# EAGLE board Breadboard Power Supply - 3.3-1.8SMD-Panel-v14 (EAGLE 6.5.0)
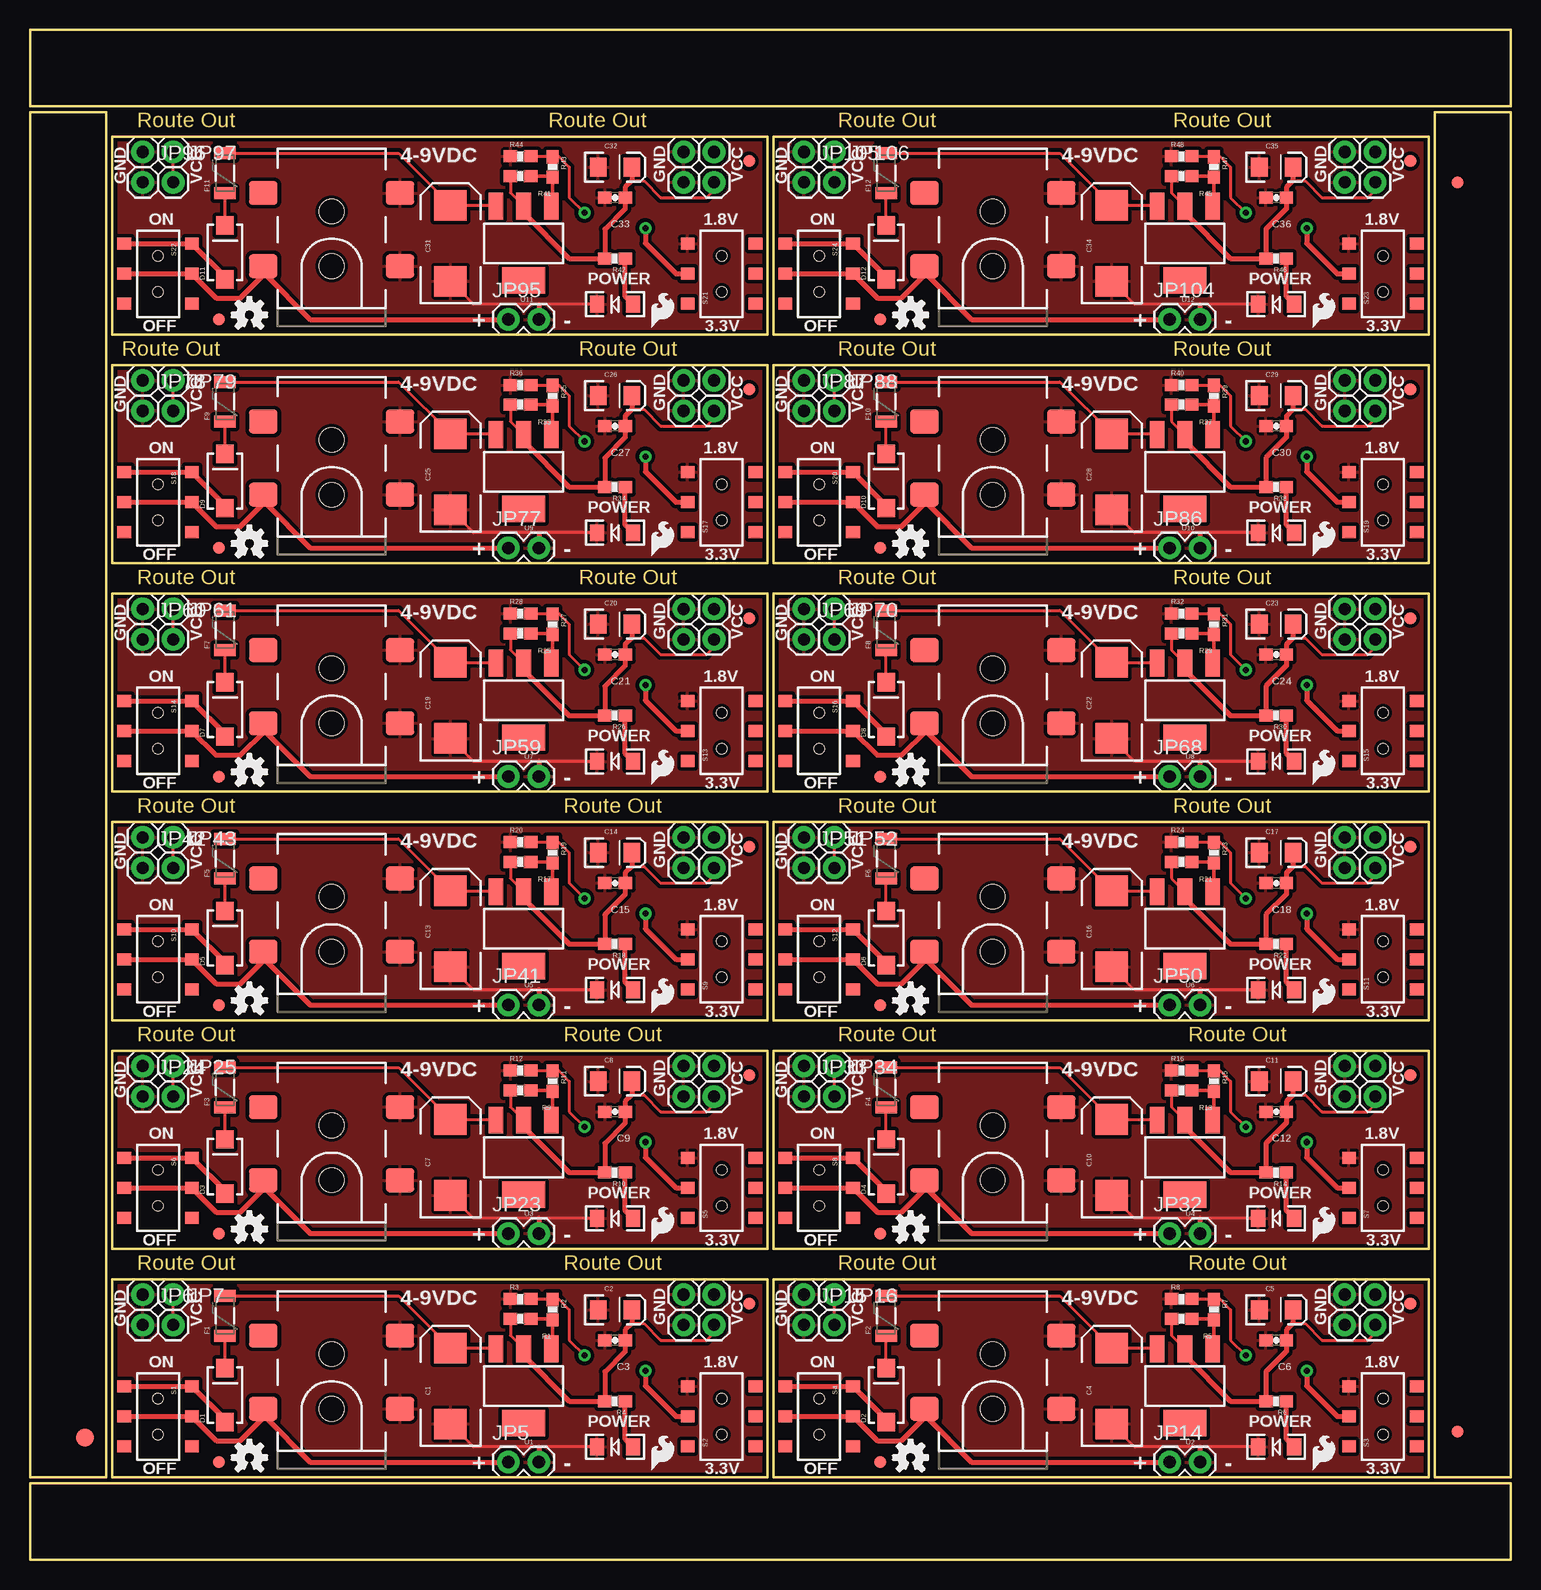
[diagram p0: board, top side]
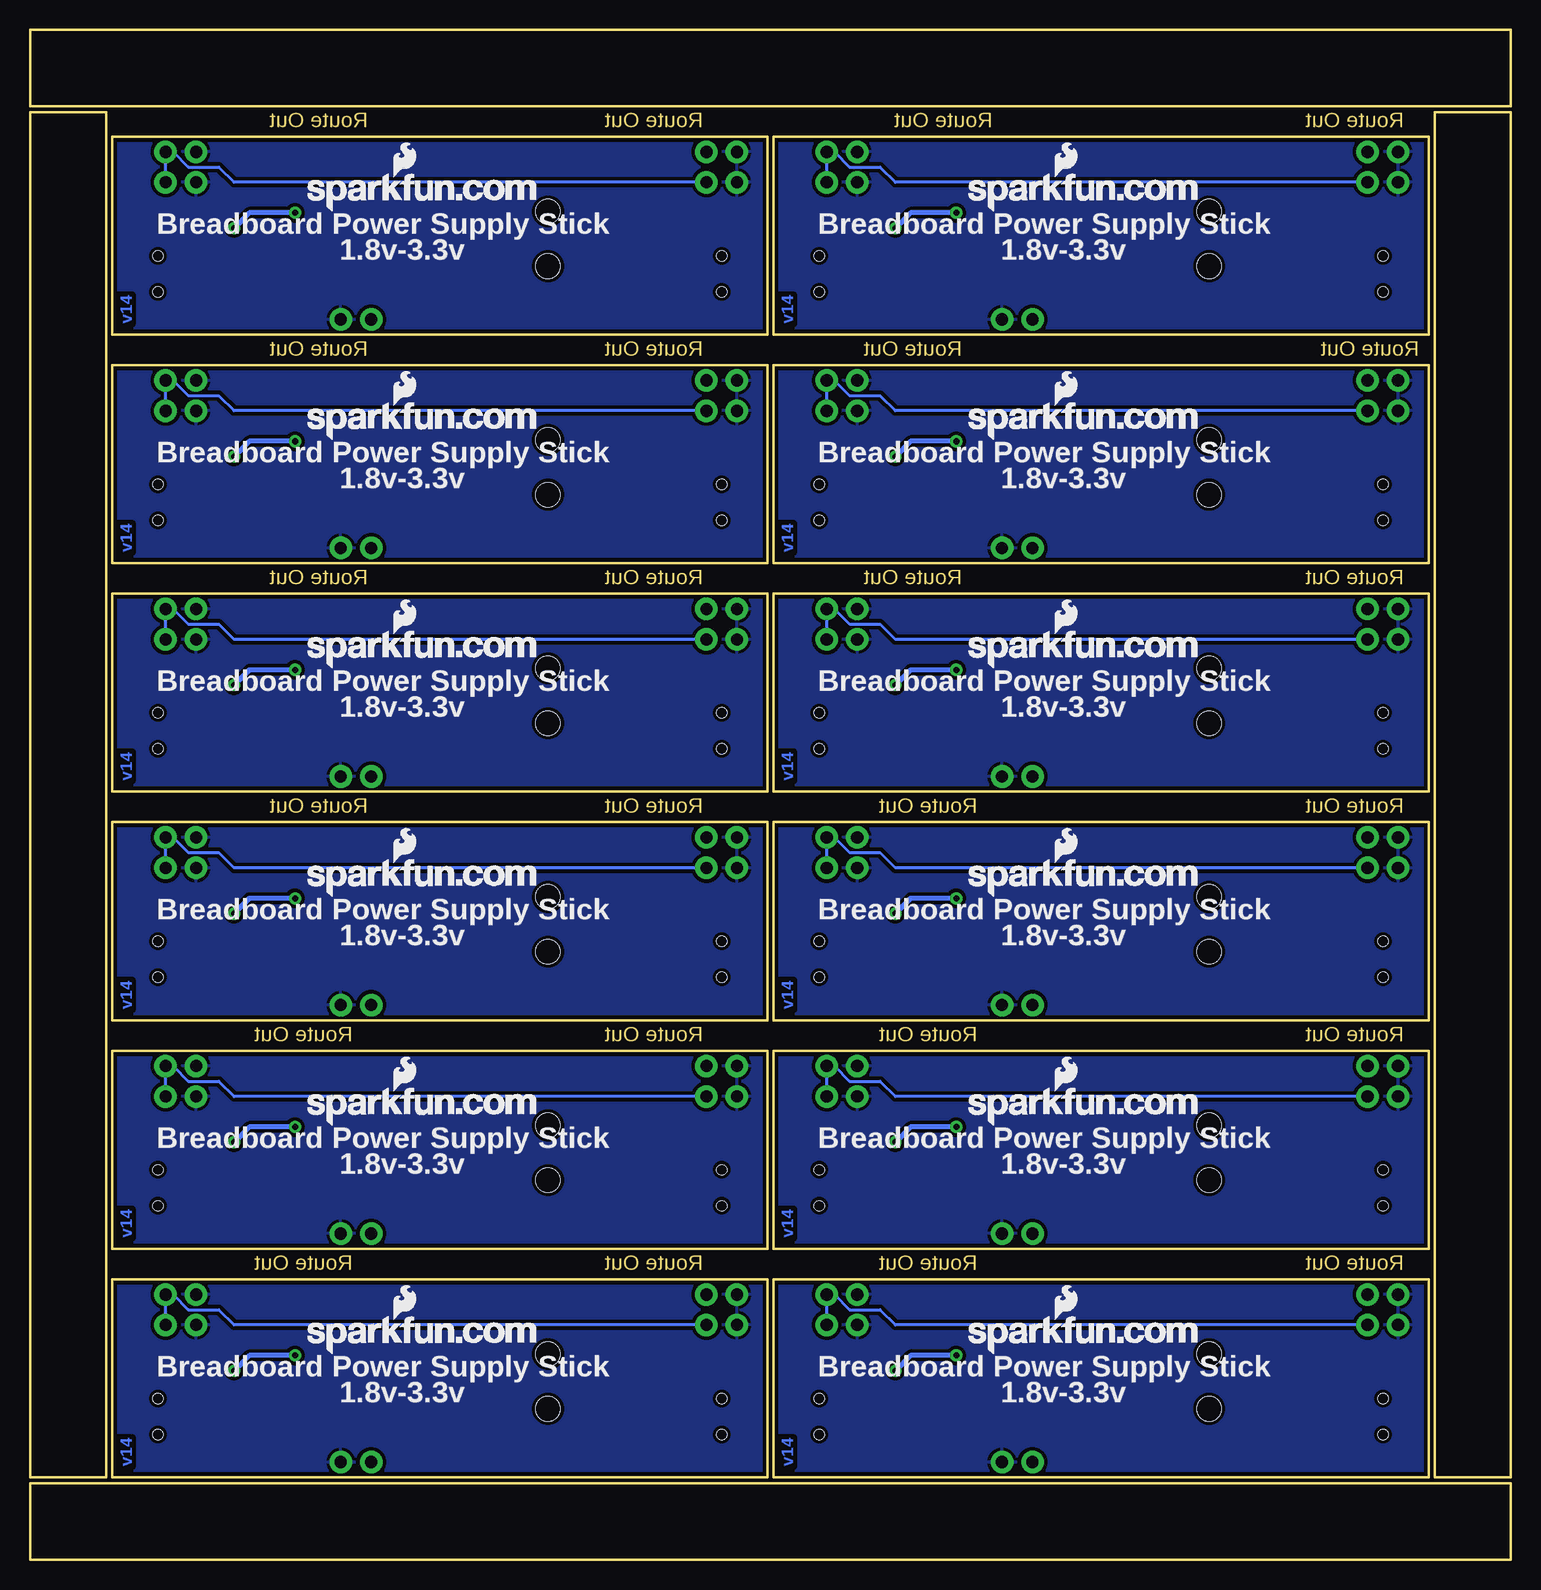
[diagram p1: board, bottom side, seen from below]

Size 123.44 x 127.51 mm. Coordinates in mm from the lower left corner, seen from the top.
Outline: 6.86,6.86 61.47,6.86 61.47,23.37 6.86,23.37 6.86,6.86
Outline: 61.98,6.86 116.59,6.86 116.59,23.37 61.98,23.37 61.98,6.86
Outline: 6.86,25.91 61.47,25.91 61.47,42.42 6.86,42.42 6.86,25.91
Outline: 61.98,25.91 116.59,25.91 116.59,42.42 61.98,42.42 61.98,25.91
Outline: 6.86,44.96 61.47,44.96 61.47,61.47 6.86,61.47 6.86,44.96
Outline: 61.98,44.96 116.59,44.96 116.59,61.47 61.98,61.47 61.98,44.96
Outline: 6.86,64.01 61.47,64.01 61.47,80.52 6.86,80.52 6.86,64.01
Outline: 61.98,64.01 116.59,64.01 116.59,80.52 61.98,80.52 61.98,64.01
Outline: 6.86,83.06 61.47,83.06 61.47,99.57 6.86,99.57 6.86,83.06
Outline: 61.98,83.06 116.59,83.06 116.59,99.57 61.98,99.57 61.98,83.06
Outline: 6.86,102.11 61.47,102.11 61.47,118.62 6.86,118.62 6.86,102.11
Outline: 61.98,102.11 116.59,102.11 116.59,118.62 61.98,118.62 61.98,102.11
Outline: 6.35,6.86 6.35,120.65 0,120.65 0,6.86 6.35,6.86
Outline: 0,0 123.44,0 123.44,6.35 0,6.35 0,0
Outline: 123.44,6.86 123.44,120.65 117.09,120.65 117.09,6.86 123.44,6.86
Outline: 123.44,127.51 0,127.51 0,121.16 123.44,121.16 123.44,127.51
Copper layers (1*16): Top 0.035mm / dielectric 1.5mm / Bottom 0.035mm
Design rules "SparkFun-2-layer": minimum track width 7mil, minimum drill 15mil, track to track 8mil, track to pad 8mil, pad to pad 8mil, via to via 8mil, smd to smd 8mil, copper to edge 8mil, drill to drill 8mil, minimum pad ring 12mil, minimum via ring 10mil, stop-mask expansion 4mil, vias tented up to drill 20mil, thermal gap 10mil
Net classes: 0 default: width 0.203 mm; 1 power: width 0.508 mm

## Footprints (pad centres in the part's own frame; a part is rotated, then mirrored left to right if it is on the bottom)
EIA7343 = smd 2.55 x 2.7: A 3.17,0; C -3.17,0
EIA3216 = smd 1.4 x 1.6: A 1.4,0; C -1.4,0
0603-CAP = smd 1.1 x 1: 1 -0.85,0; 2 0.85,0
SMA-DIODE-TYLERALT1 = smd 1.524 x 1.47: A -2.261,0; C 2.261,0
FIDUCIAL-1.5X3 = smd 1.5 x 1.5: 1 0,0
FIDUCIAL-1X2 = smd 1 x 1: 1 0,0
PTC-1206-WIDE = smd 1 x 1.8: 1 -1.654,0; 2 1.654,0
POWER_JACK_SMD_OVERPASTE_REDBOARD_0603 = smd 2 x 2.4: GND 0,-5.7; P$4 6.1,-5.7; VIN0 0,5.7; VIN1 6.1,5.7 | hole 2.032: 0,0; 4.572,0
1X01 = drill 1.016 pad 1.88: 1 0,0
1X02 = drill 1.016 pad 1.88: 1 0,0; 2 2.54,0
LED-1206 = smd 1.2 x 1.4: A -1.5,0; C 1.5,0
0603-RES = smd 1.1 x 1: 1 -0.85,0; 2 0.85,0
AYZ0202 = smd 1 x 1.15: 1 -2.5,2.825; 2 0,2.825; 3 2.5,2.825; 4 -2.5,-2.825; 5 0,-2.825; 6 2.5,-2.825 | hole 0.85: 1.5,0; -1.5,0
SOT223 = smd 1.219 x 2.235: 1 -2.311,-3.099; 2 0,-3.099; 3 2.311,-3.099 | smd 3.6 x 2.2: 4 0,3.099

## Placement (x,y rotation side)
C1  100uF  [EIA7343]  35.05,14.48 90 top
C2  10uF  [EIA3216]  48.77,20.83 0 top
C3  0.1uF  [0603-CAP]  48.77,18.29 180 top
C4  100uF  [EIA7343]  90.17,14.48 90 top
C5  10uF  [EIA3216]  103.89,20.83 0 top
C6  0.1uF  [0603-CAP]  103.89,18.29 180 top
C7  100uF  [EIA7343]  35.05,33.53 90 top
C8  10uF  [EIA3216]  48.77,39.88 0 top
C9  0.1uF  [0603-CAP]  48.77,37.34 180 top
C10  100uF  [EIA7343]  90.17,33.53 90 top
C11  10uF  [EIA3216]  103.89,39.88 0 top
C12  0.1uF  [0603-CAP]  103.89,37.34 180 top
C13  100uF  [EIA7343]  35.05,52.58 90 top
C14  10uF  [EIA3216]  48.77,58.93 0 top
C15  0.1uF  [0603-CAP]  48.77,56.39 180 top
C16  100uF  [EIA7343]  90.17,52.58 90 top
C17  10uF  [EIA3216]  103.89,58.93 0 top
C18  0.1uF  [0603-CAP]  103.89,56.39 180 top
C19  100uF  [EIA7343]  35.05,71.63 90 top
C20  10uF  [EIA3216]  48.77,77.98 0 top
C21  0.1uF  [0603-CAP]  48.77,75.44 180 top
C22  100uF  [EIA7343]  90.17,71.63 90 top
C23  10uF  [EIA3216]  103.89,77.98 0 top
C24  0.1uF  [0603-CAP]  103.89,75.44 180 top
C25  100uF  [EIA7343]  35.05,90.68 90 top
C26  10uF  [EIA3216]  48.77,97.03 0 top
C27  0.1uF  [0603-CAP]  48.77,94.49 180 top
C28  100uF  [EIA7343]  90.17,90.68 90 top
C29  10uF  [EIA3216]  103.89,97.03 0 top
C30  0.1uF  [0603-CAP]  103.89,94.49 180 top
C31  100uF  [EIA7343]  35.05,109.73 90 top
C32  10uF  [EIA3216]  48.77,116.08 0 top
C33  0.1uF  [0603-CAP]  48.77,113.54 180 top
C34  100uF  [EIA7343]  90.17,109.73 90 top
C35  10uF  [EIA3216]  103.89,116.08 0 top
C36  0.1uF  [0603-CAP]  103.89,113.54 180 top
D1  1N4001  [SMA-DIODE-TYLERALT1]  16.26,13.72 90 top
D2  1N4001  [SMA-DIODE-TYLERALT1]  71.37,13.72 90 top
D3  1N4001  [SMA-DIODE-TYLERALT1]  16.26,32.77 90 top
D4  1N4001  [SMA-DIODE-TYLERALT1]  71.37,32.77 90 top
D5  1N4001  [SMA-DIODE-TYLERALT1]  16.26,51.82 90 top
D6  1N4001  [SMA-DIODE-TYLERALT1]  71.37,51.82 90 top
D7  1N4001  [SMA-DIODE-TYLERALT1]  16.26,70.87 90 top
D8  1N4001  [SMA-DIODE-TYLERALT1]  71.37,70.87 90 top
D9  1N4001  [SMA-DIODE-TYLERALT1]  16.26,89.92 90 top
D10  1N4001  [SMA-DIODE-TYLERALT1]  71.37,89.92 90 top
D11  1N4001  [SMA-DIODE-TYLERALT1]  16.26,108.97 90 top
D12  1N4001  [SMA-DIODE-TYLERALT1]  71.37,108.97 90 top
E$1  [FIDUCIAL-1.5X3]  4.57,10.16 0 top
E$4  [FIDUCIAL-1X2]  119,10.67 0 top
E$6  [FIDUCIAL-1X2]  119,114.81 180 top
F1  PTCSMD-W  [PTC-1206-WIDE]  16.26,20.32 90 top
F2  PTCSMD-W  [PTC-1206-WIDE]  71.37,20.32 90 top
F3  PTCSMD-W  [PTC-1206-WIDE]  16.26,39.37 90 top
F4  PTCSMD-W  [PTC-1206-WIDE]  71.37,39.37 90 top
F5  PTCSMD-W  [PTC-1206-WIDE]  16.26,58.42 90 top
F6  PTCSMD-W  [PTC-1206-WIDE]  71.37,58.42 90 top
F7  PTCSMD-W  [PTC-1206-WIDE]  16.26,77.47 90 top
F8  PTCSMD-W  [PTC-1206-WIDE]  71.37,77.47 90 top
F9  PTCSMD-W  [PTC-1206-WIDE]  16.26,96.52 90 top
F10  PTCSMD-W  [PTC-1206-WIDE]  71.37,96.52 90 top
F11  PTCSMD-W  [PTC-1206-WIDE]  16.26,115.57 90 top
F12  PTCSMD-W  [PTC-1206-WIDE]  71.37,115.57 90 top
J1  POWER_JACKOVERPASTE_REDBOARD_0603  [POWER_JACK_SMD_OVERPASTE_REDBOARD_0603]  25.15,12.57 90 top
J2  POWER_JACKOVERPASTE_REDBOARD_0603  [POWER_JACK_SMD_OVERPASTE_REDBOARD_0603]  80.26,12.57 90 top
J3  POWER_JACKOVERPASTE_REDBOARD_0603  [POWER_JACK_SMD_OVERPASTE_REDBOARD_0603]  25.15,31.62 90 top
J4  POWER_JACKOVERPASTE_REDBOARD_0603  [POWER_JACK_SMD_OVERPASTE_REDBOARD_0603]  80.26,31.62 90 top
J5  POWER_JACKOVERPASTE_REDBOARD_0603  [POWER_JACK_SMD_OVERPASTE_REDBOARD_0603]  25.15,50.67 90 top
J6  POWER_JACKOVERPASTE_REDBOARD_0603  [POWER_JACK_SMD_OVERPASTE_REDBOARD_0603]  80.26,50.67 90 top
J7  POWER_JACKOVERPASTE_REDBOARD_0603  [POWER_JACK_SMD_OVERPASTE_REDBOARD_0603]  25.15,69.72 90 top
J8  POWER_JACKOVERPASTE_REDBOARD_0603  [POWER_JACK_SMD_OVERPASTE_REDBOARD_0603]  80.26,69.72 90 top
J9  POWER_JACKOVERPASTE_REDBOARD_0603  [POWER_JACK_SMD_OVERPASTE_REDBOARD_0603]  25.15,88.77 90 top
J10  POWER_JACKOVERPASTE_REDBOARD_0603  [POWER_JACK_SMD_OVERPASTE_REDBOARD_0603]  80.26,88.77 90 top
J11  POWER_JACKOVERPASTE_REDBOARD_0603  [POWER_JACK_SMD_OVERPASTE_REDBOARD_0603]  25.15,107.82 90 top
J12  POWER_JACKOVERPASTE_REDBOARD_0603  [POWER_JACK_SMD_OVERPASTE_REDBOARD_0603]  80.26,107.82 90 top
JP1  M01PTH  [1X01]  9.4,22.1 0 top
JP2  M01PTH  [1X01]  11.94,22.1 0 top
JP3  M01PTH  [1X01]  57.02,22.1 0 top
JP4  M01PTH  [1X01]  54.48,22.1 0 top
JP5  [1X02]  39.88,8.13 0 top
JP6  M01PTH  [1X01]  9.4,19.56 0 top
JP7  M01PTH  [1X01]  11.94,19.56 0 top
JP8  M01PTH  [1X01]  57.02,19.56 0 top
JP9  M01PTH  [1X01]  54.48,19.56 0 top
JP10  M01PTH  [1X01]  64.52,22.1 0 top
JP11  M01PTH  [1X01]  67.06,22.1 0 top
JP12  M01PTH  [1X01]  112.14,22.1 0 top
JP13  M01PTH  [1X01]  109.6,22.1 0 top
JP14  [1X02]  95,8.13 0 top
JP15  M01PTH  [1X01]  64.52,19.56 0 top
JP16  M01PTH  [1X01]  67.06,19.56 0 top
JP17  M01PTH  [1X01]  112.14,19.56 0 top
JP18  M01PTH  [1X01]  109.6,19.56 0 top
JP19  M01PTH  [1X01]  9.4,41.15 0 top
JP20  M01PTH  [1X01]  11.94,41.15 0 top
JP21  M01PTH  [1X01]  57.02,41.15 0 top
JP22  M01PTH  [1X01]  54.48,41.15 0 top
JP23  [1X02]  39.88,27.18 0 top
JP24  M01PTH  [1X01]  9.4,38.61 0 top
JP25  M01PTH  [1X01]  11.94,38.61 0 top
JP26  M01PTH  [1X01]  57.02,38.61 0 top
JP27  M01PTH  [1X01]  54.48,38.61 0 top
JP28  M01PTH  [1X01]  64.52,41.15 0 top
JP29  M01PTH  [1X01]  67.06,41.15 0 top
JP30  M01PTH  [1X01]  112.14,41.15 0 top
JP31  M01PTH  [1X01]  109.6,41.15 0 top
JP32  [1X02]  95,27.18 0 top
JP33  M01PTH  [1X01]  64.52,38.61 0 top
JP34  M01PTH  [1X01]  67.06,38.61 0 top
JP35  M01PTH  [1X01]  112.14,38.61 0 top
JP36  M01PTH  [1X01]  109.6,38.61 0 top
JP37  M01PTH  [1X01]  9.4,60.2 0 top
JP38  M01PTH  [1X01]  11.94,60.2 0 top
JP39  M01PTH  [1X01]  57.02,60.2 0 top
JP40  M01PTH  [1X01]  54.48,60.2 0 top
JP41  [1X02]  39.88,46.23 0 top
JP42  M01PTH  [1X01]  9.4,57.66 0 top
JP43  M01PTH  [1X01]  11.94,57.66 0 top
JP44  M01PTH  [1X01]  57.02,57.66 0 top
JP45  M01PTH  [1X01]  54.48,57.66 0 top
JP46  M01PTH  [1X01]  64.52,60.2 0 top
JP47  M01PTH  [1X01]  67.06,60.2 0 top
JP48  M01PTH  [1X01]  112.14,60.2 0 top
JP49  M01PTH  [1X01]  109.6,60.2 0 top
JP50  [1X02]  95,46.23 0 top
JP51  M01PTH  [1X01]  64.52,57.66 0 top
JP52  M01PTH  [1X01]  67.06,57.66 0 top
JP53  M01PTH  [1X01]  112.14,57.66 0 top
JP54  M01PTH  [1X01]  109.6,57.66 0 top
JP55  M01PTH  [1X01]  9.4,79.25 0 top
JP56  M01PTH  [1X01]  11.94,79.25 0 top
JP57  M01PTH  [1X01]  57.02,79.25 0 top
JP58  M01PTH  [1X01]  54.48,79.25 0 top
JP59  [1X02]  39.88,65.28 0 top
JP60  M01PTH  [1X01]  9.4,76.71 0 top
JP61  M01PTH  [1X01]  11.94,76.71 0 top
JP62  M01PTH  [1X01]  57.02,76.71 0 top
JP63  M01PTH  [1X01]  54.48,76.71 0 top
JP64  M01PTH  [1X01]  64.52,79.25 0 top
JP65  M01PTH  [1X01]  67.06,79.25 0 top
JP66  M01PTH  [1X01]  112.14,79.25 0 top
JP67  M01PTH  [1X01]  109.6,79.25 0 top
JP68  [1X02]  95,65.28 0 top
JP69  M01PTH  [1X01]  64.52,76.71 0 top
JP70  M01PTH  [1X01]  67.06,76.71 0 top
JP71  M01PTH  [1X01]  112.14,76.71 0 top
JP72  M01PTH  [1X01]  109.6,76.71 0 top
JP73  M01PTH  [1X01]  9.4,98.3 0 top
JP74  M01PTH  [1X01]  11.94,98.3 0 top
JP75  M01PTH  [1X01]  57.02,98.3 0 top
JP76  M01PTH  [1X01]  54.48,98.3 0 top
JP77  [1X02]  39.88,84.33 0 top
JP78  M01PTH  [1X01]  9.4,95.76 0 top
JP79  M01PTH  [1X01]  11.94,95.76 0 top
JP80  M01PTH  [1X01]  57.02,95.76 0 top
JP81  M01PTH  [1X01]  54.48,95.76 0 top
JP82  M01PTH  [1X01]  64.52,98.3 0 top
JP83  M01PTH  [1X01]  67.06,98.3 0 top
JP84  M01PTH  [1X01]  112.14,98.3 0 top
JP85  M01PTH  [1X01]  109.6,98.3 0 top
JP86  [1X02]  95,84.33 0 top
JP87  M01PTH  [1X01]  64.52,95.76 0 top
JP88  M01PTH  [1X01]  67.06,95.76 0 top
JP89  M01PTH  [1X01]  112.14,95.76 0 top
JP90  M01PTH  [1X01]  109.6,95.76 0 top
JP91  M01PTH  [1X01]  9.4,117.35 0 top
JP92  M01PTH  [1X01]  11.94,117.35 0 top
JP93  M01PTH  [1X01]  57.02,117.35 0 top
JP94  M01PTH  [1X01]  54.48,117.35 0 top
JP95  [1X02]  39.88,103.38 0 top
JP96  M01PTH  [1X01]  9.4,114.81 0 top
JP97  M01PTH  [1X01]  11.94,114.81 0 top
JP98  M01PTH  [1X01]  57.02,114.81 0 top
JP99  M01PTH  [1X01]  54.48,114.81 0 top
JP100  M01PTH  [1X01]  64.52,117.35 0 top
JP101  M01PTH  [1X01]  67.06,117.35 0 top
JP102  M01PTH  [1X01]  112.14,117.35 0 top
JP103  M01PTH  [1X01]  109.6,117.35 0 top
JP104  [1X02]  95,103.38 0 top
JP105  M01PTH  [1X01]  64.52,114.81 0 top
JP106  M01PTH  [1X01]  67.06,114.81 0 top
JP107  M01PTH  [1X01]  112.14,114.81 0 top
JP108  M01PTH  [1X01]  109.6,114.81 0 top
LED1  Power  [LED-1206]  103.89,9.4 180 top
LED2  Power  [LED-1206]  48.77,9.4 180 top
LED3  Power  [LED-1206]  48.77,28.45 180 top
LED4  Power  [LED-1206]  103.89,28.45 180 top
LED5  Power  [LED-1206]  48.77,47.5 180 top
LED6  Power  [LED-1206]  103.89,47.5 180 top
LED7  Power  [LED-1206]  48.77,66.55 180 top
LED8  Power  [LED-1206]  103.89,66.55 180 top
LED9  Power  [LED-1206]  48.77,85.6 180 top
LED10  Power  [LED-1206]  103.89,85.6 180 top
LED11  Power  [LED-1206]  48.77,104.65 180 top
LED12  Power  [LED-1206]  103.89,104.65 180 top
LOGO1  OSHW-LOGOS  [OSHW-LOGO-S]  18.29,8.51 0 top
LOGO2  OSHW-LOGOS  [OSHW-LOGO-S]  73.41,8.51 0 top
LOGO3  OSHW-LOGOS  [OSHW-LOGO-S]  18.29,27.56 0 top
LOGO4  OSHW-LOGOS  [OSHW-LOGO-S]  73.41,27.56 0 top
LOGO5  OSHW-LOGOS  [OSHW-LOGO-S]  18.29,46.61 0 top
LOGO6  OSHW-LOGOS  [OSHW-LOGO-S]  73.41,46.61 0 top
LOGO7  OSHW-LOGOS  [OSHW-LOGO-S]  18.29,65.66 0 top
LOGO8  OSHW-LOGOS  [OSHW-LOGO-S]  73.41,65.66 0 top
LOGO9  OSHW-LOGOS  [OSHW-LOGO-S]  18.29,84.71 0 top
LOGO10  OSHW-LOGOS  [OSHW-LOGO-S]  73.41,84.71 0 top
LOGO11  OSHW-LOGOS  [OSHW-LOGO-S]  18.29,103.76 0 top
LOGO12  OSHW-LOGOS  [OSHW-LOGO-S]  73.41,103.76 0 top
R1  240  [0603-RES]  40.89,20.07 180 top
R2  105  [0603-RES]  43.56,20.83 270 top
R3  287  [0603-RES]  40.89,21.72 0 top
R4  240  [0603-RES]  48.77,13.21 180 top
R5  240  [0603-RES]  96.01,20.07 180 top
R6  240  [0603-RES]  103.89,13.21 180 top
R7  105  [0603-RES]  98.68,20.83 270 top
R8  287  [0603-RES]  96.01,21.72 0 top
R9  240  [0603-RES]  40.89,39.12 180 top
R10  240  [0603-RES]  48.77,32.26 180 top
R11  105  [0603-RES]  43.56,39.88 270 top
R12  287  [0603-RES]  40.89,40.77 0 top
R13  240  [0603-RES]  96.01,39.12 180 top
R14  240  [0603-RES]  103.89,32.26 180 top
R15  105  [0603-RES]  98.68,39.88 270 top
R16  287  [0603-RES]  96.01,40.77 0 top
R17  240  [0603-RES]  40.89,58.17 180 top
R18  240  [0603-RES]  48.77,51.31 180 top
R19  105  [0603-RES]  43.56,58.93 270 top
R20  287  [0603-RES]  40.89,59.82 0 top
R21  240  [0603-RES]  96.01,58.17 180 top
R22  240  [0603-RES]  103.89,51.31 180 top
R23  105  [0603-RES]  98.68,58.93 270 top
R24  287  [0603-RES]  96.01,59.82 0 top
R25  240  [0603-RES]  40.89,77.22 180 top
R26  240  [0603-RES]  48.77,70.36 180 top
R27  105  [0603-RES]  43.56,77.98 270 top
R28  287  [0603-RES]  40.89,78.87 0 top
R29  240  [0603-RES]  96.01,77.22 180 top
R30  240  [0603-RES]  103.89,70.36 180 top
R31  105  [0603-RES]  98.68,77.98 270 top
R32  287  [0603-RES]  96.01,78.87 0 top
R33  240  [0603-RES]  40.89,96.27 180 top
R34  240  [0603-RES]  48.77,89.41 180 top
R35  105  [0603-RES]  43.56,97.03 270 top
R36  287  [0603-RES]  40.89,97.92 0 top
R37  240  [0603-RES]  96.01,96.27 180 top
R38  240  [0603-RES]  103.89,89.41 180 top
R39  105  [0603-RES]  98.68,97.03 270 top
R40  287  [0603-RES]  96.01,97.92 0 top
R41  240  [0603-RES]  40.89,115.32 180 top
R42  240  [0603-RES]  48.77,108.46 180 top
R43  105  [0603-RES]  43.56,116.08 270 top
R44  287  [0603-RES]  40.89,116.97 0 top
R45  240  [0603-RES]  96.01,115.32 180 top
R46  240  [0603-RES]  103.89,108.46 180 top
R47  105  [0603-RES]  98.68,116.08 270 top
R48  287  [0603-RES]  96.01,116.97 0 top
S1  On/Off  [AYZ0202]  10.67,11.94 270 top
S2  Voltage  [AYZ0202]  57.66,11.94 90 top
S3  Voltage  [AYZ0202]  112.78,11.94 90 top
S4  On/Off  [AYZ0202]  65.79,11.94 270 top
S5  Voltage  [AYZ0202]  57.66,30.99 90 top
S6  On/Off  [AYZ0202]  10.67,30.99 270 top
S7  Voltage  [AYZ0202]  112.78,30.99 90 top
S8  On/Off  [AYZ0202]  65.79,30.99 270 top
S9  Voltage  [AYZ0202]  57.66,50.04 90 top
S10  On/Off  [AYZ0202]  10.67,50.04 270 top
S11  Voltage  [AYZ0202]  112.78,50.04 90 top
S12  On/Off  [AYZ0202]  65.79,50.04 270 top
S13  Voltage  [AYZ0202]  57.66,69.09 90 top
S14  On/Off  [AYZ0202]  10.67,69.09 270 top
S15  Voltage  [AYZ0202]  112.78,69.09 90 top
S16  On/Off  [AYZ0202]  65.79,69.09 270 top
S17  Voltage  [AYZ0202]  57.66,88.14 90 top
S18  On/Off  [AYZ0202]  10.67,88.14 270 top
S19  Voltage  [AYZ0202]  112.78,88.14 90 top
S20  On/Off  [AYZ0202]  65.79,88.14 270 top
S21  Voltage  [AYZ0202]  57.66,107.19 90 top
S22  On/Off  [AYZ0202]  10.67,107.19 270 top
S23  Voltage  [AYZ0202]  112.78,107.19 90 top
S24  On/Off  [AYZ0202]  65.79,107.19 270 top
U1  V_REG_317SMD  [SOT223]  41.15,14.48 180 top
U2  V_REG_317SMD  [SOT223]  96.27,14.48 180 top
U3  V_REG_317SMD  [SOT223]  41.15,33.53 180 top
U4  V_REG_317SMD  [SOT223]  96.27,33.53 180 top
U5  V_REG_317SMD  [SOT223]  41.15,52.58 180 top
U6  V_REG_317SMD  [SOT223]  96.27,52.58 180 top
U7  V_REG_317SMD  [SOT223]  41.15,71.63 180 top
U8  V_REG_317SMD  [SOT223]  96.27,71.63 180 top
U9  V_REG_317SMD  [SOT223]  41.15,90.68 180 top
U10  V_REG_317SMD  [SOT223]  96.27,90.68 180 top
U11  V_REG_317SMD  [SOT223]  41.15,109.73 180 top
U12  V_REG_317SMD  [SOT223]  96.27,109.73 180 top
U$1  LOGO-SFESK  [SFE-LOGO-FLAME]  51.82,7.49 0 top
U$2  LOGO-SFENEW  [SFE-NEW-WEBLOGO]  45.21,17.14 0 bottom
U$3  FIDUCIAL1X2  [FIDUCIAL-1X2]  15.75,8.13 0 top
U$4  FIDUCIAL1X2  [FIDUCIAL-1X2]  59.94,21.34 0 top
U$5  LOGO-SFESK  [SFE-LOGO-FLAME]  106.93,7.49 0 top
U$6  LOGO-SFENEW  [SFE-NEW-WEBLOGO]  100.33,17.14 0 bottom
U$7  FIDUCIAL1X2  [FIDUCIAL-1X2]  70.87,8.13 0 top
U$8  FIDUCIAL1X2  [FIDUCIAL-1X2]  115.06,21.34 0 top
U$9  LOGO-SFESK  [SFE-LOGO-FLAME]  51.82,26.54 0 top
U$10  LOGO-SFENEW  [SFE-NEW-WEBLOGO]  45.21,36.2 0 bottom
U$11  FIDUCIAL1X2  [FIDUCIAL-1X2]  15.75,27.18 0 top
U$12  FIDUCIAL1X2  [FIDUCIAL-1X2]  59.94,40.39 0 top
U$13  LOGO-SFESK  [SFE-LOGO-FLAME]  106.93,26.54 0 top
U$14  LOGO-SFENEW  [SFE-NEW-WEBLOGO]  100.33,36.2 0 bottom
U$15  FIDUCIAL1X2  [FIDUCIAL-1X2]  70.87,27.18 0 top
U$16  FIDUCIAL1X2  [FIDUCIAL-1X2]  115.06,40.39 0 top
U$17  LOGO-SFESK  [SFE-LOGO-FLAME]  51.82,45.59 0 top
U$18  LOGO-SFENEW  [SFE-NEW-WEBLOGO]  45.21,55.24 0 bottom
U$19  FIDUCIAL1X2  [FIDUCIAL-1X2]  15.75,46.23 0 top
U$20  FIDUCIAL1X2  [FIDUCIAL-1X2]  59.94,59.44 0 top
U$21  LOGO-SFESK  [SFE-LOGO-FLAME]  106.93,45.59 0 top
U$22  LOGO-SFENEW  [SFE-NEW-WEBLOGO]  100.33,55.24 0 bottom
U$23  FIDUCIAL1X2  [FIDUCIAL-1X2]  70.87,46.23 0 top
U$24  FIDUCIAL1X2  [FIDUCIAL-1X2]  115.06,59.44 0 top
U$25  LOGO-SFESK  [SFE-LOGO-FLAME]  51.82,64.64 0 top
U$26  LOGO-SFENEW  [SFE-NEW-WEBLOGO]  45.21,74.3 0 bottom
U$27  FIDUCIAL1X2  [FIDUCIAL-1X2]  15.75,65.28 0 top
U$28  FIDUCIAL1X2  [FIDUCIAL-1X2]  59.94,78.49 0 top
U$29  LOGO-SFESK  [SFE-LOGO-FLAME]  106.93,64.64 0 top
U$30  LOGO-SFENEW  [SFE-NEW-WEBLOGO]  100.33,74.3 0 bottom
U$31  FIDUCIAL1X2  [FIDUCIAL-1X2]  70.87,65.28 0 top
U$32  FIDUCIAL1X2  [FIDUCIAL-1X2]  115.06,78.49 0 top
U$33  LOGO-SFESK  [SFE-LOGO-FLAME]  51.82,83.69 0 top
U$34  LOGO-SFENEW  [SFE-NEW-WEBLOGO]  45.21,93.34 0 bottom
U$35  FIDUCIAL1X2  [FIDUCIAL-1X2]  15.75,84.33 0 top
U$36  FIDUCIAL1X2  [FIDUCIAL-1X2]  59.94,97.54 0 top
U$37  LOGO-SFESK  [SFE-LOGO-FLAME]  106.93,83.69 0 top
U$38  LOGO-SFENEW  [SFE-NEW-WEBLOGO]  100.33,93.34 0 bottom
U$39  FIDUCIAL1X2  [FIDUCIAL-1X2]  70.87,84.33 0 top
U$40  FIDUCIAL1X2  [FIDUCIAL-1X2]  115.06,97.54 0 top
U$41  LOGO-SFESK  [SFE-LOGO-FLAME]  51.82,102.74 0 top
U$42  LOGO-SFENEW  [SFE-NEW-WEBLOGO]  45.21,112.39 0 bottom
U$43  FIDUCIAL1X2  [FIDUCIAL-1X2]  15.75,103.38 0 top
U$44  FIDUCIAL1X2  [FIDUCIAL-1X2]  59.94,116.59 0 top
U$45  LOGO-SFESK  [SFE-LOGO-FLAME]  106.93,102.74 0 top
U$46  LOGO-SFENEW  [SFE-NEW-WEBLOGO]  100.33,112.39 0 bottom
U$47  FIDUCIAL1X2  [FIDUCIAL-1X2]  70.87,103.38 0 top
U$48  FIDUCIAL1X2  [FIDUCIAL-1X2]  115.06,116.59 0 top

## Library data of the parts
C1-C36 JP1-JP108 S1-S24 U1-U12 U$1-U$48 = SparkFun
D1-D12 J1-J12 = Testing
E$1 = SparkFun-Retired
E$4 E$6 LOGO1-LOGO12 = SparkFun-Aesthetics
F1-F12 = SparkFun-PowerIC
LED1-LED12 = SparkFun-Nate
R1 R4-R6 R9 R10 R13 R14 R17 R18 R21 R22 R25 R26 R29 R30 R33 R34 R37 R38 R41 R42 R45 R46 = SparkFun-Resistors; PROD_ID: RES-07849
R2 R7 R11 R15 R19 R23 R27 R31 R35 R39 R43 R47 = SparkFun-Resistors; PROD_ID: RES-10751
R3 R8 R12 R16 R20 R24 R28 R32 R36 R40 R44 R48 = SparkFun-Resistors; PROD_ID: RES-10752

## Nets
GND: C1.C C2.C C3.2 J1.GND J1.P$4 JP1.1 JP4.1 JP5.2 JP6.1 JP9.1 LED2.C R3.1 S2.3
GND1: C4.C C5.C C6.2 J2.GND J2.P$4 JP10.1 JP13.1 JP14.2 JP15.1 JP18.1 LED1.C R8.1 S3.3
GND2: C7.C C8.C C9.2 J3.GND J3.P$4 JP19.1 JP22.1 JP23.2 JP24.1 JP27.1 LED3.C R12.1 S5.3
GND3: C10.C C11.C C12.2 J4.GND J4.P$4 JP28.1 JP31.1 JP32.2 JP33.1 JP36.1 LED4.C R16.1 S7.3
GND4: C13.C C14.C C15.2 J5.GND J5.P$4 JP37.1 JP40.1 JP41.2 JP42.1 JP45.1 LED5.C R20.1 S9.3
GND5: C16.C C17.C C18.2 J6.GND J6.P$4 JP46.1 JP49.1 JP50.2 JP51.1 JP54.1 LED6.C R24.1 S11.3
GND6: C19.C C20.C C21.2 J7.GND J7.P$4 JP55.1 JP58.1 JP59.2 JP60.1 JP63.1 LED7.C R28.1 S13.3
GND7: C22.C C23.C C24.2 J8.GND J8.P$4 JP64.1 JP67.1 JP68.2 JP69.1 JP72.1 LED8.C R32.1 S15.3
GND8: C25.C C26.C C27.2 J9.GND J9.P$4 JP73.1 JP76.1 JP77.2 JP78.1 JP81.1 LED9.C R36.1 S17.3
GND9: C28.C C29.C C30.2 J10.GND J10.P$4 JP82.1 JP85.1 JP86.2 JP87.1 JP90.1 LED10.C R40.1 S19.3
GND10: C31.C C32.C C33.2 J11.GND J11.P$4 JP91.1 JP94.1 JP95.2 JP96.1 JP99.1 LED11.C R44.1 S21.3
GND11: C34.C C35.C C36.2 J12.GND J12.P$4 JP100.1 JP103.1 JP104.2 JP105.1 JP108.1 LED12.C R48.1 S23.3
N$1: D1.C F1.1
N$2: D1.A S1.1 S1.4
N$3: R5.1 R7.2 U2.1
N$4: R2.1 R3.2 S2.2
N$5: R1.1 R2.2 U1.1
N$6: LED1.A R6.1
N$7: D2.C F2.1
N$8: LED2.A R4.1
N$9: D2.A S4.1 S4.4
N$10: R7.1 R8.2 S3.2
N$11: R9.1 R11.2 U3.1
N$12: LED3.A R10.1
N$13: D3.C F3.1
N$14: D3.A S6.1 S6.4
N$15: R11.1 R12.2 S5.2
N$16: R13.1 R15.2 U4.1
N$17: LED4.A R14.1
N$18: D4.C F4.1
N$19: D4.A S8.1 S8.4
N$20: R15.1 R16.2 S7.2
N$21: R17.1 R19.2 U5.1
N$22: LED5.A R18.1
N$23: D5.C F5.1
N$24: D5.A S10.1 S10.4
N$25: R19.1 R20.2 S9.2
N$26: R21.1 R23.2 U6.1
N$27: LED6.A R22.1
N$28: D6.C F6.1
N$29: D6.A S12.1 S12.4
N$30: R23.1 R24.2 S11.2
N$31: R25.1 R27.2 U7.1
N$32: LED7.A R26.1
N$33: D7.C F7.1
N$34: D7.A S14.1 S14.4
N$35: R27.1 R28.2 S13.2
N$36: R29.1 R31.2 U8.1
N$37: LED8.A R30.1
N$38: D8.C F8.1
N$39: D8.A S16.1 S16.4
N$40: R31.1 R32.2 S15.2
N$41: R33.1 R35.2 U9.1
N$42: LED9.A R34.1
N$43: D9.C F9.1
N$44: D9.A S18.1 S18.4
N$45: R35.1 R36.2 S17.2
N$46: R37.1 R39.2 U10.1
N$47: LED10.A R38.1
N$48: D10.C F10.1
N$49: D10.A S20.1 S20.4
N$50: R39.1 R40.2 S19.2
N$51: R41.1 R43.2 U11.1
N$52: LED11.A R42.1
N$53: D11.C F11.1
N$54: D11.A S22.1 S22.4
N$55: R43.1 R44.2 S21.2
N$56: R45.1 R47.2 U12.1
N$57: LED12.A R46.1
N$58: D12.C F12.1
N$59: D12.A S24.1 S24.4
N$60: R47.1 R48.2 S23.2
RAW: C1.A F1.2 U1.3
RAW1: C4.A F2.2 U2.3
RAW2: C7.A F3.2 U3.3
RAW3: C10.A F4.2 U4.3
RAW4: C13.A F5.2 U5.3
RAW5: C16.A F6.2 U6.3
RAW6: C19.A F7.2 U7.3
RAW7: C22.A F8.2 U8.3
RAW8: C25.A F9.2 U9.3
RAW9: C28.A F10.2 U10.3
RAW10: C31.A F11.2 U11.3
RAW11: C34.A F12.2 U12.3
VCC: C2.A C3.1 JP2.1 JP3.1 JP7.1 JP8.1 R1.2 R4.2 U1.2
VCC1: C5.A C6.1 JP11.1 JP12.1 JP16.1 JP17.1 R5.2 R6.2 U2.2
VCC2: C8.A C9.1 JP20.1 JP21.1 JP25.1 JP26.1 R9.2 R10.2 U3.2
VCC3: C11.A C12.1 JP29.1 JP30.1 JP34.1 JP35.1 R13.2 R14.2 U4.2
VCC4: C14.A C15.1 JP38.1 JP39.1 JP43.1 JP44.1 R17.2 R18.2 U5.2
VCC5: C17.A C18.1 JP47.1 JP48.1 JP52.1 JP53.1 R21.2 R22.2 U6.2
VCC6: C20.A C21.1 JP56.1 JP57.1 JP61.1 JP62.1 R25.2 R26.2 U7.2
VCC7: C23.A C24.1 JP65.1 JP66.1 JP70.1 JP71.1 R29.2 R30.2 U8.2
VCC8: C26.A C27.1 JP74.1 JP75.1 JP79.1 JP80.1 R33.2 R34.2 U9.2
VCC9: C29.A C30.1 JP83.1 JP84.1 JP88.1 JP89.1 R37.2 R38.2 U10.2
VCC10: C32.A C33.1 JP92.1 JP93.1 JP97.1 JP98.1 R41.2 R42.2 U11.2
VCC11: C35.A C36.1 JP101.1 JP102.1 JP106.1 JP107.1 R45.2 R46.2 U12.2
VIN: J1.VIN0 JP5.1 S1.2 S1.5
VIN1: J2.VIN0 JP14.1 S4.2 S4.5
VIN2: J3.VIN0 JP23.1 S6.2 S6.5
VIN3: J4.VIN0 JP32.1 S8.2 S8.5
VIN4: J5.VIN0 JP41.1 S10.2 S10.5
VIN5: J6.VIN0 JP50.1 S12.2 S12.5
VIN6: J7.VIN0 JP59.1 S14.2 S14.5
VIN7: J8.VIN0 JP68.1 S16.2 S16.5
VIN8: J9.VIN0 JP77.1 S18.2 S18.5
VIN9: J10.VIN0 JP86.1 S20.2 S20.5
VIN10: J11.VIN0 JP95.1 S22.2 S22.5
VIN11: J12.VIN0 JP104.1 S24.2 S24.5

## Tracks (layer width: path | path; a pad name or v marks a point on that pad's centre or on a via)
GND
  Top 0.254: LED2.C 42.42,9.4 36.96,9.4 C1.C
  Top 0.406: 42.42,9.4 JP5.2
  pour Bottom (isolate 0.305): 6.86,23.37 61.47,23.37 61.47,6.86 6.86,6.86
  pour Top (isolate 0.305): 6.86,6.86 6.86,23.37 61.47,23.37 61.47,6.86
GND1
  Top 0.254: LED1.C 97.54,9.4 92.08,9.4 C4.C
  Top 0.406: 97.54,9.4 JP14.2
  pour Bottom (isolate 0.305): 61.98,23.37 116.59,23.37 116.59,6.86 61.98,6.86
  pour Top (isolate 0.305): 61.98,6.86 61.98,23.37 116.59,23.37 116.59,6.86
GND2
  Top 0.254: LED3.C 42.42,28.45 36.96,28.45 C7.C
  Top 0.406: 42.42,28.45 JP23.2
  pour Bottom (isolate 0.305): 6.86,42.42 61.47,42.42 61.47,25.91 6.86,25.91
  pour Top (isolate 0.305): 6.86,25.91 6.86,42.42 61.47,42.42 61.47,25.91
GND3
  Top 0.254: LED4.C 97.54,28.45 92.08,28.45 C10.C
  Top 0.406: 97.54,28.45 JP32.2
  pour Bottom (isolate 0.305): 61.98,42.42 116.59,42.42 116.59,25.91 61.98,25.91
  pour Top (isolate 0.305): 61.98,25.91 61.98,42.42 116.59,42.42 116.59,25.91
GND4
  Top 0.254: LED5.C 42.42,47.5 36.96,47.5 C13.C
  Top 0.406: 42.42,47.5 JP41.2
  pour Bottom (isolate 0.305): 6.86,61.47 61.47,61.47 61.47,44.96 6.86,44.96
  pour Top (isolate 0.305): 6.86,44.96 6.86,61.47 61.47,61.47 61.47,44.96
GND5
  Top 0.254: LED6.C 97.54,47.5 92.08,47.5 C16.C
  Top 0.406: 97.54,47.5 JP50.2
  pour Bottom (isolate 0.305): 61.98,61.47 116.59,61.47 116.59,44.96 61.98,44.96
  pour Top (isolate 0.305): 61.98,44.96 61.98,61.47 116.59,61.47 116.59,44.96
GND6
  Top 0.254: LED7.C 42.42,66.55 36.96,66.55 C19.C
  Top 0.406: 42.42,66.55 JP59.2
  pour Bottom (isolate 0.305): 6.86,80.52 61.47,80.52 61.47,64.01 6.86,64.01
  pour Top (isolate 0.305): 6.86,64.01 6.86,80.52 61.47,80.52 61.47,64.01
GND7
  Top 0.254: LED8.C 97.54,66.55 92.08,66.55 C22.C
  Top 0.406: 97.54,66.55 JP68.2
  pour Bottom (isolate 0.305): 61.98,80.52 116.59,80.52 116.59,64.01 61.98,64.01
  pour Top (isolate 0.305): 61.98,64.01 61.98,80.52 116.59,80.52 116.59,64.01
GND8
  Top 0.254: LED9.C 42.42,85.6 36.96,85.6 C25.C
  Top 0.406: 42.42,85.6 JP77.2
  pour Bottom (isolate 0.305): 6.86,99.57 61.47,99.57 61.47,83.06 6.86,83.06
  pour Top (isolate 0.305): 6.86,83.06 6.86,99.57 61.47,99.57 61.47,83.06
GND9
  Top 0.254: LED10.C 97.54,85.6 92.08,85.6 C28.C
  Top 0.406: 97.54,85.6 JP86.2
  pour Bottom (isolate 0.305): 61.98,99.57 116.59,99.57 116.59,83.06 61.98,83.06
  pour Top (isolate 0.305): 61.98,83.06 61.98,99.57 116.59,99.57 116.59,83.06
GND10
  Top 0.254: LED11.C 42.42,104.65 36.96,104.65 C31.C
  Top 0.406: 42.42,104.65 JP95.2
  pour Bottom (isolate 0.305): 6.86,118.62 61.47,118.62 61.47,102.11 6.86,102.11
  pour Top (isolate 0.305): 6.86,102.11 6.86,118.62 61.47,118.62 61.47,102.11
GND11
  Top 0.254: LED12.C 97.54,104.65 92.08,104.65 C34.C
  Top 0.406: 97.54,104.65 JP104.2
  pour Bottom (isolate 0.305): 61.98,118.62 116.59,118.62 116.59,102.11 61.98,102.11
  pour Top (isolate 0.305): 61.98,102.11 61.98,118.62 116.59,118.62 116.59,102.11
N$1
  Top 0.254: D1.C F1.1
N$2
  Top 0.406: S1.4 S1.1 16.26,11.68 D1.A
N$3
  Top 0.305: U2.1 98.68,17.58 R7.2 98.59,20.07 R5.1
N$4  (via drill 0.51)
  Top 0.254: v46.23,17.02 44.96,18.29 44.96,20.83 44.11,21.68 R2.1 | 43.4,21.84 R2.1 | R3.2 43.52,21.72 arc-90 R2.1
  Top 0.406: S2.2 53.85,11.94 51.31,14.48 v51.31,15.75
  Bottom 0.406: v46.23,17.02 50.04,17.02 v51.31,15.75
N$5
  Top 0.305: U1.1 43.56,17.58 R2.2 43.47,20.07 R1.1
N$6
  Top 0.406: LED1.A 104.74,10.05 R6.1
N$7
  Top 0.254: D2.C F2.1
N$8
  Top 0.406: LED2.A 49.62,10.05 R4.1
N$9
  Top 0.406: S4.4 S4.1 71.37,11.68 D2.A
N$10  (via drill 0.51)
  Top 0.254: v101.35,17.02 100.08,18.29 100.08,20.83 99.23,21.68 R7.1 | 98.51,21.84 R7.1 | R8.2 98.64,21.72 arc-90 R7.1
  Top 0.406: S3.2 108.97,11.94 106.43,14.48 v106.43,15.75
  Bottom 0.406: v101.35,17.02 105.16,17.02 v106.43,15.75
N$11
  Top 0.305: U3.1 43.56,36.63 R11.2 43.47,39.12 R9.1
N$12
  Top 0.406: LED3.A 49.62,29.1 R10.1
N$13
  Top 0.254: D3.C F3.1
N$14
  Top 0.406: S6.4 S6.1 16.26,30.73 D3.A
N$15  (via drill 0.51)
  Top 0.254: v46.23,36.07 44.96,37.34 44.96,39.88 44.11,40.73 R11.1 | 43.4,40.89 R11.1 | R12.2 43.52,40.77 arc-90 R11.1
  Top 0.406: S5.2 53.85,30.99 51.31,33.53 v51.31,34.8
  Bottom 0.406: v46.23,36.07 50.04,36.07 v51.31,34.8
N$16
  Top 0.305: U4.1 98.68,36.63 R15.2 98.59,39.12 R13.1
N$17
  Top 0.406: LED4.A 104.74,29.1 R14.1
N$18
  Top 0.254: D4.C F4.1
N$19
  Top 0.406: S8.4 S8.1 71.37,30.73 D4.A
N$20  (via drill 0.51)
  Top 0.254: v101.35,36.07 100.08,37.34 100.08,39.88 99.23,40.73 R15.1 | 98.51,40.89 R15.1 | R16.2 98.64,40.77 arc-90 R15.1
  Top 0.406: S7.2 108.97,30.99 106.43,33.53 v106.43,34.8
  Bottom 0.406: v101.35,36.07 105.16,36.07 v106.43,34.8
N$21
  Top 0.305: U5.1 43.56,55.68 R19.2 43.47,58.17 R17.1
N$22
  Top 0.406: LED5.A 49.62,48.15 R18.1
N$23
  Top 0.254: D5.C F5.1
N$24
  Top 0.406: S10.4 S10.1 16.26,49.77 D5.A
N$25  (via drill 0.51)
  Top 0.254: v46.23,55.12 44.96,56.39 44.96,58.93 44.11,59.78 R19.1 | 43.4,59.94 R19.1 | R20.2 43.52,59.82 arc-90 R19.1
  Top 0.406: S9.2 53.85,50.04 51.31,52.58 v51.31,53.85
  Bottom 0.406: v46.23,55.12 50.04,55.12 v51.31,53.85
N$26
  Top 0.305: U6.1 98.68,55.68 R23.2 98.59,58.17 R21.1
N$27
  Top 0.406: LED6.A 104.74,48.15 R22.1
N$28
  Top 0.254: D6.C F6.1
N$29
  Top 0.406: S12.4 S12.1 71.37,49.77 D6.A
N$30  (via drill 0.51)
  Top 0.254: v101.35,55.12 100.08,56.39 100.08,58.93 99.23,59.78 R23.1 | 98.51,59.94 R23.1 | R24.2 98.64,59.82 arc-90 R23.1
  Top 0.406: S11.2 108.97,50.04 106.43,52.58 v106.43,53.85
  Bottom 0.406: v101.35,55.12 105.16,55.12 v106.43,53.85
N$31
  Top 0.305: U7.1 43.56,74.73 R27.2 43.47,77.22 R25.1
N$32
  Top 0.406: LED7.A 49.62,67.2 R26.1
N$33
  Top 0.254: D7.C F7.1
N$34
  Top 0.406: S14.4 S14.1 16.26,68.83 D7.A
N$35  (via drill 0.51)
  Top 0.254: v46.23,74.17 44.96,75.44 44.96,77.98 44.11,78.83 R27.1 | 43.4,78.99 R27.1 | R28.2 43.52,78.87 arc-90 R27.1
  Top 0.406: S13.2 53.85,69.09 51.31,71.63 v51.31,72.9
  Bottom 0.406: v46.23,74.17 50.04,74.17 v51.31,72.9
N$36
  Top 0.305: U8.1 98.68,74.73 R31.2 98.59,77.22 R29.1
N$37
  Top 0.406: LED8.A 104.74,67.2 R30.1
N$38
  Top 0.254: D8.C F8.1
N$39
  Top 0.406: S16.4 S16.1 71.37,68.83 D8.A
N$40  (via drill 0.51)
  Top 0.254: v101.35,74.17 100.08,75.44 100.08,77.98 99.23,78.83 R31.1 | 98.51,78.99 R31.1 | R32.2 98.64,78.87 arc-90 R31.1
  Top 0.406: S15.2 108.97,69.09 106.43,71.63 v106.43,72.9
  Bottom 0.406: v101.35,74.17 105.16,74.17 v106.43,72.9
N$41
  Top 0.305: U9.1 43.56,93.78 R35.2 43.47,96.27 R33.1
N$42
  Top 0.406: LED9.A 49.62,86.25 R34.1
N$43
  Top 0.254: D9.C F9.1
N$44
  Top 0.406: S18.4 S18.1 16.26,87.88 D9.A
N$45  (via drill 0.51)
  Top 0.254: v46.23,93.22 44.96,94.49 44.96,97.03 44.11,97.88 R35.1 | 43.4,98.04 R35.1 | R36.2 43.52,97.92 arc-90 R35.1
  Top 0.406: S17.2 53.85,88.14 51.31,90.68 v51.31,91.95
  Bottom 0.406: v46.23,93.22 50.04,93.22 v51.31,91.95
N$46
  Top 0.305: U10.1 98.68,93.78 R39.2 98.59,96.27 R37.1
N$47
  Top 0.406: LED10.A 104.74,86.25 R38.1
N$48
  Top 0.254: D10.C F10.1
N$49
  Top 0.406: S20.4 S20.1 71.37,87.88 D10.A
N$50  (via drill 0.51)
  Top 0.254: v101.35,93.22 100.08,94.49 100.08,97.03 99.23,97.88 R39.1 | 98.51,98.04 R39.1 | R40.2 98.64,97.92 arc-90 R39.1
  Top 0.406: S19.2 108.97,88.14 106.43,90.68 v106.43,91.95
  Bottom 0.406: v101.35,93.22 105.16,93.22 v106.43,91.95
N$51
  Top 0.305: U11.1 43.56,112.83 R43.2 43.47,115.32 R41.1
N$52
  Top 0.406: LED11.A 49.62,105.3 R42.1
N$53
  Top 0.254: D11.C F11.1
N$54
  Top 0.406: S22.4 S22.1 16.26,106.92 D11.A
N$55  (via drill 0.51)
  Top 0.254: v46.23,112.27 44.96,113.54 44.96,116.08 44.11,116.93 R43.1 | 43.4,117.09 R43.1 | R44.2 43.52,116.97 arc-90 R43.1
  Top 0.406: S21.2 53.85,107.19 51.31,109.73 v51.31,111
  Bottom 0.406: v46.23,112.27 50.04,112.27 v51.31,111
N$56
  Top 0.305: U12.1 98.68,112.83 R47.2 98.59,115.32 R45.1
N$57
  Top 0.406: LED12.A 104.74,105.3 R46.1
N$58
  Top 0.254: D12.C F12.1
N$59
  Top 0.406: S24.4 S24.1 71.37,106.92 D12.A
N$60  (via drill 0.51)
  Top 0.254: v101.35,112.27 100.08,113.54 100.08,116.08 99.23,116.93 R47.1 | 98.51,117.09 R47.1 | R48.2 98.64,116.97 arc-90 R47.1
  Top 0.406: S23.2 108.97,107.19 106.43,109.73 v106.43,111
  Bottom 0.406: v101.35,112.27 105.16,112.27 v106.43,111
RAW
  Top 0.254: F1.2 30.73,21.97 C1.A 38.77,17.65 U1.3
RAW1
  Top 0.254: F2.2 85.84,21.97 C4.A 93.88,17.65 U2.3
RAW2
  Top 0.254: F3.2 30.73,41.02 C7.A 38.77,36.7 U3.3
RAW3
  Top 0.254: F4.2 85.84,41.02 C10.A 93.88,36.7 U4.3
RAW4
  Top 0.254: F5.2 30.73,60.07 C13.A 38.77,55.75 U5.3
RAW5
  Top 0.254: F6.2 85.84,60.07 C16.A 93.88,55.75 U6.3
RAW6
  Top 0.254: F7.2 30.73,79.12 C19.A 38.77,74.8 U7.3
RAW7
  Top 0.254: F8.2 85.84,79.12 C22.A 93.88,74.8 U8.3
RAW8
  Top 0.254: F9.2 30.73,98.17 C25.A 38.77,93.85 U9.3
RAW9
  Top 0.254: F10.2 85.84,98.17 C28.A 93.88,93.85 U10.3
RAW10
  Top 0.254: F11.2 30.73,117.22 C31.A 38.77,112.9 U11.3
RAW11
  Top 0.254: F12.2 85.84,117.22 C34.A 93.88,112.9 U12.3
VCC
  Top 0.254: JP7.1 JP2.1 | R1.2 40.04,18.68 U1.2 | 50.17,19.69 51.18,19.69 52.58,18.29 56.39,18.29 57.02,18.92 JP8.1
  Top 0.406: C2.A 50.04,20.83 | U1.2 41.15,17.02 44.96,13.21 R4.2 47.92,15.66 49.62,17.36 C3.1 49.62,19.14 50.17,19.69 C2.A | 50.42,20.57 arc-90 C2.A
  Bottom 0.254: JP7.1 51.31,19.56 52.58,20.83 55.12,20.83 56.39,22.1 JP3.1 JP8.1
VCC1
  Top 0.254: JP16.1 JP11.1 | R5.2 95.16,18.68 U2.2 | 105.29,19.69 106.3,19.69 107.7,18.29 111.51,18.29 112.14,18.92 JP17.1
  Top 0.406: C5.A 105.16,20.83 | U2.2 96.27,17.02 100.08,13.21 R6.2 103.04,15.66 104.74,17.36 C6.1 104.74,19.14 105.29,19.69 C5.A | 105.54,20.57 arc-90 C5.A
  Bottom 0.254: JP16.1 106.43,19.56 107.7,20.83 110.24,20.83 111.51,22.1 JP12.1 JP17.1
VCC2
  Top 0.254: JP25.1 JP20.1 | R9.2 40.04,37.73 U3.2 | 50.17,38.74 51.18,38.74 52.58,37.34 56.39,37.34 57.02,37.97 JP26.1
  Top 0.406: C8.A 50.04,39.88 | U3.2 41.15,36.07 44.96,32.26 R10.2 47.92,34.71 49.62,36.41 C9.1 49.62,38.19 50.17,38.74 C8.A | 50.42,39.62 arc-90 C8.A
  Bottom 0.254: JP25.1 51.31,38.61 52.58,39.88 55.12,39.88 56.39,41.15 JP21.1 JP26.1
VCC3
  Top 0.254: JP34.1 JP29.1 | R13.2 95.16,37.73 U4.2 | 105.29,38.74 106.3,38.74 107.7,37.34 111.51,37.34 112.14,37.97 JP35.1
  Top 0.406: C11.A 105.16,39.88 | U4.2 96.27,36.07 100.08,32.26 R14.2 103.04,34.71 104.74,36.41 C12.1 104.74,38.19 105.29,38.74 C11.A | 105.54,39.62 arc-90 C11.A
  Bottom 0.254: JP34.1 106.43,38.61 107.7,39.88 110.24,39.88 111.51,41.15 JP30.1 JP35.1
VCC4
  Top 0.254: JP43.1 JP38.1 | R17.2 40.04,56.78 U5.2 | 50.17,57.79 51.18,57.79 52.58,56.39 56.39,56.39 57.02,57.02 JP44.1
  Top 0.406: C14.A 50.04,58.93 | U5.2 41.15,55.12 44.96,51.31 R18.2 47.92,53.76 49.62,55.46 C15.1 49.62,57.24 50.17,57.79 C14.A | 50.42,58.67 arc-90 C14.A
  Bottom 0.254: JP43.1 51.31,57.66 52.58,58.93 55.12,58.93 56.39,60.2 JP39.1 JP44.1
VCC5
  Top 0.254: JP52.1 JP47.1 | R21.2 95.16,56.78 U6.2 | 105.29,57.79 106.3,57.79 107.7,56.39 111.51,56.39 112.14,57.02 JP53.1
  Top 0.406: C17.A 105.16,58.93 | U6.2 96.27,55.12 100.08,51.31 R22.2 103.04,53.76 104.74,55.46 C18.1 104.74,57.24 105.29,57.79 C17.A | 105.54,58.67 arc-90 C17.A
  Bottom 0.254: JP52.1 106.43,57.66 107.7,58.93 110.24,58.93 111.51,60.2 JP48.1 JP53.1
VCC6
  Top 0.254: JP61.1 JP56.1 | R25.2 40.04,75.83 U7.2 | 50.17,76.84 51.18,76.84 52.58,75.44 56.39,75.44 57.02,76.07 JP62.1
  Top 0.406: C20.A 50.04,77.98 | U7.2 41.15,74.17 44.96,70.36 R26.2 47.92,72.81 49.62,74.51 C21.1 49.62,76.29 50.17,76.84 C20.A | 50.42,77.72 arc-90 C20.A
  Bottom 0.254: JP61.1 51.31,76.71 52.58,77.98 55.12,77.98 56.39,79.25 JP57.1 JP62.1
VCC7
  Top 0.254: JP70.1 JP65.1 | R29.2 95.16,75.83 U8.2 | 105.29,76.84 106.3,76.84 107.7,75.44 111.51,75.44 112.14,76.07 JP71.1
  Top 0.406: C23.A 105.16,77.98 | U8.2 96.27,74.17 100.08,70.36 R30.2 103.04,72.81 104.74,74.51 C24.1 104.74,76.29 105.29,76.84 C23.A | 105.54,77.72 arc-90 C23.A
  Bottom 0.254: JP70.1 106.43,76.71 107.7,77.98 110.24,77.98 111.51,79.25 JP66.1 JP71.1
VCC8
  Top 0.254: JP79.1 JP74.1 | R33.2 40.04,94.88 U9.2 | 50.17,95.89 51.18,95.89 52.58,94.49 56.39,94.49 57.02,95.12 JP80.1
  Top 0.406: C26.A 50.04,97.03 | U9.2 41.15,93.22 44.96,89.41 R34.2 47.92,91.86 49.62,93.56 C27.1 49.62,95.34 50.17,95.89 C26.A | 50.42,96.77 arc-90 C26.A
  Bottom 0.254: JP79.1 51.31,95.76 52.58,97.03 55.12,97.03 56.39,98.3 JP75.1 JP80.1
VCC9
  Top 0.254: JP88.1 JP83.1 | R37.2 95.16,94.88 U10.2 | 105.29,95.89 106.3,95.89 107.7,94.49 111.51,94.49 112.14,95.12 JP89.1
  Top 0.406: C29.A 105.16,97.03 | U10.2 96.27,93.22 100.08,89.41 R38.2 103.04,91.86 104.74,93.56 C30.1 104.74,95.34 105.29,95.89 C29.A | 105.54,96.77 arc-90 C29.A
  Bottom 0.254: JP88.1 106.43,95.76 107.7,97.03 110.24,97.03 111.51,98.3 JP84.1 JP89.1
VCC10
  Top 0.254: JP97.1 JP92.1 | R41.2 40.04,113.93 U11.2 | 50.17,114.94 51.18,114.94 52.58,113.54 56.39,113.54 57.02,114.17 JP98.1
  Top 0.406: C32.A 50.04,116.08 | U11.2 41.15,112.27 44.96,108.46 R42.2 47.92,110.91 49.62,112.61 C33.1 49.62,114.39 50.17,114.94 C32.A | 50.42,115.82 arc-90 C32.A
  Bottom 0.254: JP97.1 51.31,114.81 52.58,116.08 55.12,116.08 56.39,117.35 JP93.1 JP98.1
VCC11
  Top 0.254: JP106.1 JP101.1 | R45.2 95.16,113.93 U12.2 | 105.29,114.94 106.3,114.94 107.7,113.54 111.51,113.54 112.14,114.17 JP107.1
  Top 0.406: C35.A 105.16,116.08 | U12.2 96.27,112.27 100.08,108.46 R46.2 103.04,110.91 104.74,112.61 C36.1 104.74,114.39 105.29,114.94 C35.A | 105.54,115.82 arc-90 C35.A
  Bottom 0.254: JP106.1 106.43,114.81 107.7,116.08 110.24,116.08 111.51,117.35 JP102.1 JP107.1
VIN
  Top 0.406: S1.5 S1.2 15.53,9.91 17.53,9.91 19.56,11.94 | JP5.1 23.37,8.13 19.56,11.94 | J1.VIN0 19.45,12.05 19.56,11.94
VIN1
  Top 0.406: S4.5 S4.2 70.64,9.91 72.64,9.91 74.68,11.94 | JP14.1 78.49,8.13 74.68,11.94 | J2.VIN0 74.56,12.05 74.68,11.94
VIN2
  Top 0.406: S6.5 S6.2 15.53,28.96 17.53,28.96 19.56,30.99 | JP23.1 23.37,27.18 19.56,30.99 | J3.VIN0 19.45,31.1 19.56,30.99
VIN3
  Top 0.406: S8.5 S8.2 70.64,28.96 72.64,28.96 74.68,30.99 | JP32.1 78.49,27.18 74.68,30.99 | J4.VIN0 74.56,31.1 74.68,30.99
VIN4
  Top 0.406: S10.5 S10.2 15.53,48.01 17.53,48.01 19.56,50.04 | JP41.1 23.37,46.23 19.56,50.04 | J5.VIN0 19.45,50.15 19.56,50.04
VIN5
  Top 0.406: S12.5 S12.2 70.64,48.01 72.64,48.01 74.68,50.04 | JP50.1 78.49,46.23 74.68,50.04 | J6.VIN0 74.56,50.15 74.68,50.04
VIN6
  Top 0.406: S14.5 S14.2 15.53,67.06 17.53,67.06 19.56,69.09 | JP59.1 23.37,65.28 19.56,69.09 | J7.VIN0 19.45,69.2 19.56,69.09
VIN7
  Top 0.406: S16.5 S16.2 70.64,67.06 72.64,67.06 74.68,69.09 | JP68.1 78.49,65.28 74.68,69.09 | J8.VIN0 74.56,69.2 74.68,69.09
VIN8
  Top 0.406: S18.5 S18.2 15.53,86.11 17.53,86.11 19.56,88.14 | JP77.1 23.37,84.33 19.56,88.14 | J9.VIN0 19.45,88.25 19.56,88.14
VIN9
  Top 0.406: S20.5 S20.2 70.64,86.11 72.64,86.11 74.68,88.14 | JP86.1 78.49,84.33 74.68,88.14 | J10.VIN0 74.56,88.25 74.68,88.14
VIN10
  Top 0.406: S22.5 S22.2 15.53,105.16 17.53,105.16 19.56,107.19 | JP95.1 23.37,103.38 19.56,107.19 | J11.VIN0 19.45,107.3 19.56,107.19
VIN11
  Top 0.406: S24.5 S24.2 70.64,105.16 72.64,105.16 74.68,107.19 | JP104.1 78.49,103.38 74.68,107.19 | J12.VIN0 74.56,107.3 74.68,107.19

## Text on the board
Bottom: v14 | v14 | v14 | v14 | v14 | v14 | v14 | v14 | v14 | v14 | v14 | v14
Dimension: Route Out | Route Out | Route Out | Route Out | Route Out | Route Out | Route Out | Route Out | Route Out | Route Out | Route Out | Route Out | Route Out | Route Out | Route Out | Route Out | Route Out | Route Out | Route Out | Route Out | Route Out | Route Out | Route Out | Route Out
tPlace: 4-9VDC | 4-9VDC | GND | VCC | GND | VCC | GND | VCC | GND | VCC | ON | 1.8V | ON | 1.8V | POWER | POWER | + | - | + | - | OFF | 3.3V | OFF | 3.3V | 4-9VDC | 4-9VDC | GND | VCC | GND | VCC | GND | VCC | GND | VCC | ON | 1.8V | ON | 1.8V | POWER | POWER | + | - | + | - | OFF | 3.3V | OFF | 3.3V | 4-9VDC | 4-9VDC | GND | VCC | GND | VCC | GND | VCC | GND | VCC | ON | 1.8V | ON | 1.8V | POWER | POWER | + | - | + | - | OFF | 3.3V | OFF | 3.3V | 4-9VDC | 4-9VDC | GND | VCC | GND | VCC | GND | VCC | GND | VCC | ON | 1.8V | ON | 1.8V | POWER | POWER | OFF | + | - | 3.3V | OFF | + | - | 3.3V | 4-9VDC | 4-9VDC | GND | VCC | GND | VCC | GND | VCC | GND | VCC | ON | 1.8V | ON | 1.8V | POWER | POWER | OFF | + | - | 3.3V | OFF | + | - | 3.3V | 4-9VDC | 4-9VDC | GND | VCC | GND | VCC | GND | VCC | GND | VCC | ON | 1.8V | ON | 1.8V | POWER | POWER | OFF | + | - | 3.3V | OFF | + | - | 3.3V
bPlace: Breadboard Power Supply Stick | Breadboard Power Supply Stick | 1.8v-3.3v | 1.8v-3.3v | Breadboard Power Supply Stick | Breadboard Power Supply Stick | 1.8v-3.3v | 1.8v-3.3v | Breadboard Power Supply Stick | Breadboard Power Supply Stick | 1.8v-3.3v | 1.8v-3.3v | Breadboard Power Supply Stick | Breadboard Power Supply Stick | 1.8v-3.3v | 1.8v-3.3v | Breadboard Power Supply Stick | Breadboard Power Supply Stick | 1.8v-3.3v | 1.8v-3.3v | Breadboard Power Supply Stick | Breadboard Power Supply Stick | 1.8v-3.3v | 1.8v-3.3v